# Altium PCB PCB.PcbDoc
Units mil, origin at the board's own origin, x right, y up, seen from the top; angles counter-clockwise.
Board outline 6000 x 4000 mil, 2 copper layers (Top Layer, Bottom Layer); 65 components, 41 nets, 200 pads, 0 vias.
Unrouted connection lines stored in the file: 130.
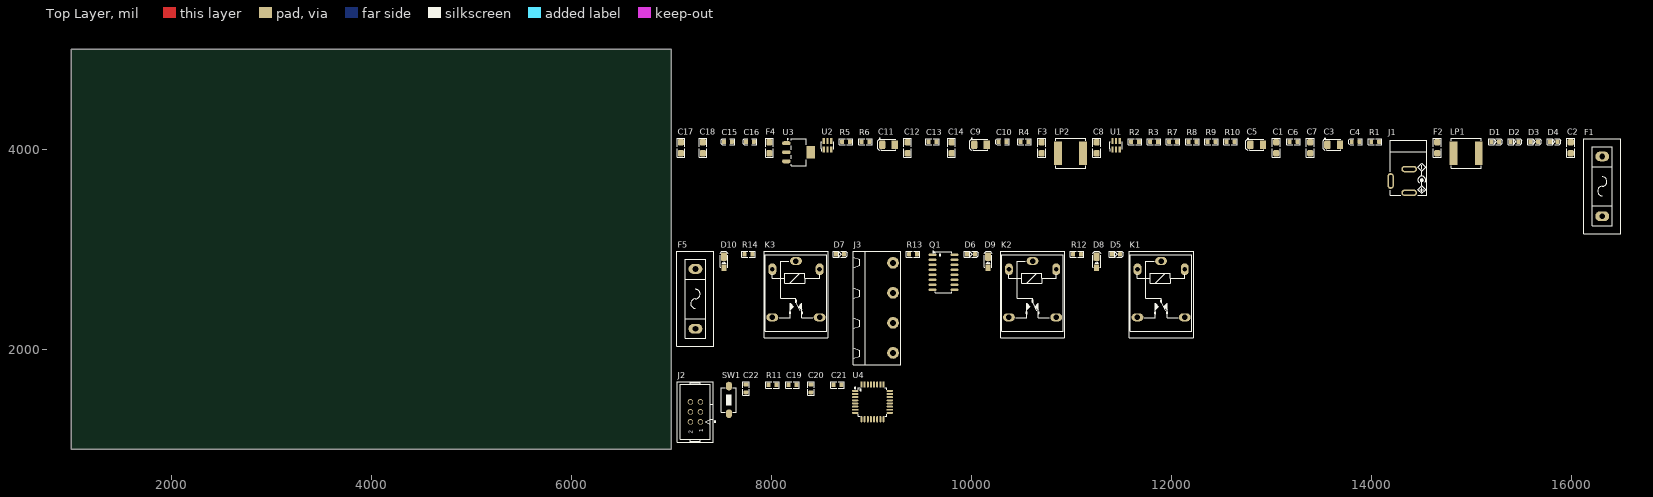
[diagram p0: Top Layer view]
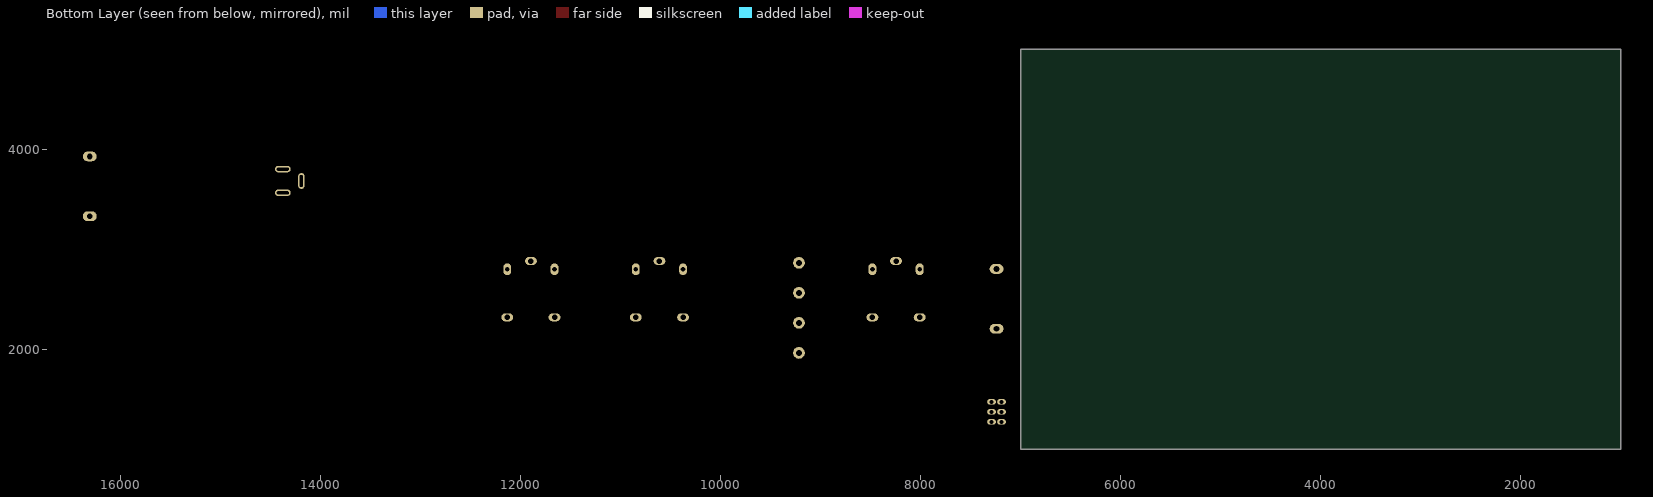
[diagram p1: Bottom Layer view, seen from below]

## Layer stack, top to bottom
Top Solder: solder mask 0.4, Solder Resist, Dk 3.5
Top Layer: signal copper 1.4
Dielectric 1: dielectric 12.6, FR-4, Dk 4.8
Bottom Layer: signal copper 1.4
Bottom Solder: solder mask 0.4, Solder Resist, Dk 3.5

## Board outline
1000,1000 7000,1000 7000,5000 1000,5000

## Design rules (kind name [scope] priority, off if disabled: settings)
Clearance [All] p1: gap=10 ignorepadtopadclearanceinfootprint=FALSE
PolygonConnect [All] p1: connectstyle=Relief reliefconductorwidth=10 reliefentries=4 polygonreliefangle="90 Angle" airgapwidth=10
RoutingVias [All] p1: holewidth=28 width=50 viastyle="Through Hole" minholewidth=28 minwidth=50 maxholewidth=28 maxwidth=50
SolderMaskExpansion [All] p1: expansion=4 istentingtop=FALSE
Width [All] p1: maxlimit=10 minlimit=10 preferedwidth=10
30 further rules are at their usual default settings.

## Classes and differential pairs
component class U_Supply: C1 C2 C3 C4 C5 C6 C7 C8 C9 C10 C11 C12 C13 C14 C15 C16 C17 C18 D1 D2 D3 D4 F1 F2 F3 F4 J1 LP1 LP2 R1 R2 R3 R4 R5 R6 R7 R8 R9 R10 U1 U2 U3
component class U_Outputs: D5 D6 D7 D8 D9 D10 F5 J3 K1 K2 K3 Q1 R12 R13 R14
component class U_Controller: C19 C20 C21 C22 J2 R11 SW1 U4

## Components (designator, comment, footprint, x,y, rotation, side; value= is the part's Value field where it differs from the comment)
C1 "100nF" C1206 13045,4015 r90 top
C2 "100nF" C1206 15990,4015 r90 top
C3 "47uF" C_TN_3528_BLK 13620,4045 r0 top
C4 "10uF" C_TN_2012 13840,4075 r0 top
C5 "10uF" C_TN_3528 12850,4045 r0 top
C6 "68pF" C0805 13220,4075 r0 top
C7 "100nF" C1206 13385,4015 r90 top
C8 "100nF" C1206 11250,4015 r90 top
C9 "47uF" C_TN_3528_BLK 10090,4045 r0 top
C10 "10uF" C_TN_2012 10310,4075 r0 top
C11 "10uF" C_TN_3528 9170,4045 r0 top
C12 "100nF" C1206 9360,4015 r90 top
C13 "82pF" C0805 9610,4075 r0 top
C14 "100nF" C1206 9800,4015 r90 top
C15 "10uF" C_TN_2012 7565,4075 r0 top
C16 "22uF" C_TN_2012 7785,4075 r0 top
C17 "100nF" C1206 7095,4015 r90 top
C18 "100nF" C1206 7315,4015 r90 top
C19 "100nF" C0805 8210,1645 r0 top
C20 "100nF" C0805 8395,1610 r90 top
C21 "100nF" C0805 8660,1645 r0 top
C22 "100nF" C0805 7745,1610 r90 top
D1 "LED805YLW" LED0805YLW 15235,4075 r0 top
D2 "LED805RED" LED0805RED 15430,4075 r0 top
D3 "LED805BLU" LED0805BLU 15625,4075 r0 top
D4 "LED805GRN" LED0805GRN 15820,4075 r0 top
D5 "LED805GRN" LED0805GRN 11445,2950 r0 top
D6 "LED805GRN" LED0805GRN 9995,2950 r0 top
D7 "LED805GRN" LED0805GRN 8685,2950 r0 top
D8 "1N5819" D_SOD123W 11250,2880 r90 top
D9 "1N5819" D_SOD123W 10165,2880 r90 top
D10 "1N5819" D_SOD123W 7525,2880 r90 top
F1 "FUSE2A" FUSH_5X20MM 16305,3630 r90 top
F2 "FUSE3A_1206" F1206 14655,4015 r90 top
F3 "FUSE3A_1206" F1206 10700,4015 r90 top
F4 "FUSE3A_1206" F1206 7980,4015 r90 top
F5 "FUSE2A" FUSH_5X20MM 7240,2505 r90 top
J1 "DC_POWER_JACK" JAC_PWR2 14375,3565 r0 top
J2 "CONN_ISP" IDC_2X3 7240,1375 r90 top
J3 "CONN_GMSTB4" GMSTB762_4 9215,2415 r90 top
K1 "RELAY_SPDT" REL_SPDT_5_2216 11895,2800 r0 top
K2 "RELAY_SPDT" REL_SPDT_5_2216 10610,2800 r0 top
K3 "RELAY_SPDT" REL_SPDT_5_2216 8245,2800 r0 top
LP1 "10uH" L_7 14945,3960 r0 top
LP2 "10uH" L_7 10990,3960 r0 top
Q1 "ULN2003" SO_16 9720,2770 r0 top
R1 "49.9b" R0805 14035,4075 r0 top
R2 "17.8K" R0805 11635,4075 r0 top
R3 "100K" R0805 11825,4075 r0 top
R4 "49.9b" R0805 10530,4075 r0 top
R5 "13.7K" R0805 8745,4075 r0 top
R6 "100K" R0805 8940,4075 r0 top
R7 "1.8k" R0805 12015,4075 r0 top
R8 "680b" R0805 12210,4075 r0 top
R9 "100b" R0805 12400,4075 r0 top
R10 "220b" R0805 12590,4075 r0 top
R11 "10K" R0805 8010,1645 r0 top
R12 "1.8K" R0805 11055,2950 r0 top
R13 "1.8K" R0805 9415,2950 r0 top
R14 "1.8K" R0805 7770,2950 r0 top
SW1 "PUSHBUTTON" SWPBS_SPST_6X3X2 7575,1495 r90 top
U1 "Value?" SOT23-6 11445,4040 r0 top
U2 "Value?" SOT23-6 8560,4040 r0 top
U3 "LD1117" SOT223_4 8275,3970 r0 top
U4 "ATMEGA328" QFG80_32 9010,1475 r0 top

## Footprints (in the part's own frame and the unit in brackets; to place one, negate y for a bottom-side part, rotate by r counter-clockwise, add the part's x,y. Pads: shape width x height; smd on the part's side, far side on the other; paste and mask are expansions set on the pad)
C0805 [mm] "CHIP Capacitor, 2.0X1.3mm, 0805"
  rrect50% 1x1.2 smd paste-0.1 mask+0.075: 1(-1,0) 2(1,0)
  Top Layer pour cut-out: -0.5,0.8 0.5,0.8 0.5,-0.8 -0.5,-0.8
  silkscreen extent -1.7,-0.8 1.7,0.8, body extent -1,-0.62 1,0.63, height 1
C1206 [mm] "CHIP Capacitor, 3.2X1.6mm, 1206"
  rrect50% 1.6x1.6 smd paste-0.8 mask+0.075: 1(-1.4,0) 2(1.4,0)
  Top Layer pour cut-out: -0.8,1 -0.8,-1 0.8,-1 0.8,1
  silkscreen extent -2.4,-1 2.4,1, body extent -1.6,-0.8 1.6,0.8, height 1
C_TN_2012 [mm] "CAPACITOR, TAN N, TAN P, TAN R, 0805P, 2X1.3mm"
  rrect50% 1x1.2 smd paste-0.089 mask+0.075: 1(-1,0) 2(1,0)
  Top Layer pour cut-out: -0.5,0.8 0.5,0.8 0.5,-0.8 -0.5,-0.8
  silkscreen extent -1.7,-0.8 1.7,0.8, body extent -1.04,-0.69 1.21,0.66, height 1.35
C_TN_3528 [mm] "CAPACITOR, TAN B, TAN H, TAN T, TAN M, 3528P, 1210P, 3.5X2.8mm"
  rrect50% 1.6x2.2 smd paste-0.152 mask+0.1: 1(-1.6,0)
  rect 1.6x2.2 smd paste-0.151 mask+0.1: 2(1.6,0)
  Top Layer pour cut-out: -0.889,1.4 -0.889,-1.4 0.889,-1.4 0.889,1.4
  silkscreen extent -2.7,-1.4 1.8,1.65, body extent -1.85,-1.46 1.85,1.47, height 2.03
C_TN_3528_BLK [mm] "CAPACITOR, TAN B, 3.5X2.8mm, BLACK"
  rrect50% 1.6x2.2 smd paste-0.152 mask+0.1: 1(-1.6,0)
  rect 1.6x2.2 smd paste-0.151 mask+0.1: 2(1.6,0)
  Top Layer pour cut-out: -0.889,1.4 -0.889,-1.4 0.889,-1.4 0.889,1.4
  silkscreen extent -2.7,-1.4 1.8,1.65, body extent -1.85,-1.5 1.85,1.5, height 2.1
D_SOD123W [mm] "PowerDI-123, SOD123, DO-213AA, 1206D"
  rect 1.6x1.2 smd paste-0.1 mask+0.1: 1(-1.6,0)
  rrect50% 2.2x1.6 smd paste-0.1 mask+0.1: 2(1.2,0)
  Top Layer pour cut-out: -1.016,1.1 -1.016,-1.1 1.016,-1.1 1.016,1.1
  silkscreen extent -1.5,-1 2.6,1, body extent -1.95,-0.97 1.95,0.96, height 1
F1206 [mm] "FUSE, 1206, 3.2x1.6mm"
  rrect50% 1.6x1.6 smd paste-2 mask+0.075: 1(-1.4,0) 2(1.4,0)
  Top Layer pour cut-out: -0.8,1 -0.8,-1 0.8,-1 0.8,1
  silkscreen extent -2.4,-1 2.4,1, body extent -1.6,-0.8 1.6,0.8, height 1
FUSH_5X20MM [mm] "PCB Fuse Holder 5x20mm 2 PIN, pitch: 15.0mm  24x9mm"
  oval 2.5x3.5 hole 1.5: 1(-7.6,0) 2(7.6,0)
  silkscreen extent -12.1,-4.7 12.1,4.7, body extent -12,-4.54 12,4.54, height 13.46
GMSTB762_4 [mm] "PHOENIX, GMSTB 2,5/4-G-7,62, 7.62mm pitch, 4pin"
  round 3 hole 1.5: 1(-11.43,0) 2(-3.81,0) 3(3.81,0) 4(11.43,0)
  silkscreen extent -14.4,-2 14.4,10.1, body extent -14.34,-1.9 14.34,10.1, height 9.1
IDC_2X3 [mm]
  round 1.4 / inner round 1.4 / far side oval 1.4x2.2 hole 1 mask+0.1: 1(-2.54,-1.27) 2(-2.54,1.27) 3(0,-1.27) 4(0,1.27) 5(2.54,-1.27) 6(2.54,1.27)
  silkscreen extent -7.7,-5.2 7.7,4.6, body extent -7.64,-4.42 7.64,4.75, height 9.13
JAC_PWR2 [mm] "DC POWER JACK, Power Jack KLDX-0202"
  oval 4x1.6 hole 0.8 slot 3 at 0 deg: 1(0,0) 2(0,6)
  oval 1.6x4 hole 0.8 slot 3 at 90 deg: 3(-4.7,3)
  silkscreen extent -4.8,-0.6 4.5,13.4, body extent -4.9,-0.65 4.5,13.85, height 10.8
L_7 [mm] "INDUCTOR, 7.3x7.3x4.5mm, CDRH74, 7.2x6.9mm, 7.1x6.5mm"
  rect 2x6 smd paste-3: 1(-3.2,0) 2(3.2,0)
  silkscreen extent -3.8,-3.8 3.8,3.8, body extent -3.7,-3.7 3.7,3.7, height 4.15
LED0805BLU [mm] "LED SMD 0805, BLUE"
  rect 1x1.2 smd paste-2 mask+0.075: 1(-1,0)
  rrect50% 1x1.2 smd paste-2 mask+0.075: 2(1,0)
  Top Layer pour cut-out: -0.5,0.8 0.5,0.8 0.5,-0.8 -0.5,-0.8
  silkscreen extent -1.7,-0.8 1.8,0.8, body extent -1,-0.63 1,0.63, height 0.7
LED0805GRN [mm] "LED SMD 0805, GREEN"
  rect 1x1.2 smd paste-2 mask+0.075: 1(-1,0)
  rrect50% 1x1.2 smd paste-2 mask+0.075: 2(1,0)
  Top Layer pour cut-out: -0.5,0.8 0.5,0.8 0.5,-0.8 -0.5,-0.8
  silkscreen extent -1.7,-0.8 1.8,0.8, body extent -1,-0.63 1,0.63, height 0.7
LED0805RED [mm] "LED SMD 0805, RED"
  rect 1x1.2 smd paste-2 mask+0.075: 1(-1,0)
  rrect50% 1x1.2 smd paste-2 mask+0.075: 2(1,0)
  Top Layer pour cut-out: -0.5,0.8 0.5,0.8 0.5,-0.8 -0.5,-0.8
  silkscreen extent -1.7,-0.8 1.8,0.8, body extent -1,-0.63 1,0.63, height 0.7
LED0805YLW [mm] "LED SMD 0805, YELLOW"
  rect 1x1.2 smd paste-2 mask+0.075: 1(-1,0)
  rrect50% 1x1.2 smd paste-2 mask+0.075: 2(1,0)
  Top Layer pour cut-out: -0.5,0.8 0.5,0.8 0.5,-0.8 -0.5,-0.8
  silkscreen extent -1.7,-0.8 1.8,0.8, body extent -1,-0.63 1,0.63, height 0.7
QFG80_32 [mm] "TQFP32, A32 (Cypress), GP32 (Zarlink), MS-026ABA(JEDEC), 7X7mm, 0.8mm"
  oval 1.6x0.5 smd: 1(-4.4,2.8) 2(-4.4,2) 3(-4.4,1.2) 4(-4.4,0.4) 5(-4.4,-0.4) 6(-4.4,-1.2) 7(-4.4,-2) 8(-4.4,-2.8) 17(4.4,-2.8) 18(4.4,-2) 19(4.4,-1.2) 20(4.4,-0.4) 21(4.4,0.4) 22(4.4,1.2) 23(4.4,2) 24(4.4,2.8)
  oval 0.5x1.6 smd: 9(-2.8,-4.4) 10(-2,-4.4) 11(-1.2,-4.4) 12(-0.4,-4.4) 13(0.4,-4.4) 14(1.2,-4.4) 15(2,-4.4) 16(2.8,-4.4) 25(2.8,4.4) 26(2,4.4) 27(1.2,4.4) 28(0.4,4.4) 29(-0.4,4.4) 30(-1.2,4.4) 31(-2,4.4) 32(-2.8,4.4)
  silkscreen extent -4.6,-3.6 3.6,3.7, body extent -4.5,-4.5 4.5,4.5, height 1.6
R0805 [mm] "CHIP RESISTOR 1/8 WATT ,2.0X1.3mm, 0805, 2012"
  rrect50% 1x1.2 smd paste-0.1 mask+0.075: 1(-1,0) 2(1,0)
  Top Layer pour cut-out: -0.5,0.8 0.5,0.8 0.5,-0.8 -0.5,-0.8
  silkscreen extent -1.7,-0.8 1.7,0.8, body extent -1.15,-0.67 1.15,0.68, height 0.76
REL_SPDT_5_2216 [mm] "RELAY SPDT, OMRON G5LE SERIES, 22X16mm and 18.8x15.4mm, HJR-3FF, RAS-1215"
  oval 3x2 hole 1.4: 1(0,2.1) 2(6,-12.2) 3(-6,-12.2)
  oval 2x3 hole 1.2: 4(-6,0) 5(6,0)
  silkscreen extent -8.1,-17.35 8.1,4.65, body extent -7.95,-15.75 7.95,3.75, height 15.5
SO_16 [mm] "SOP, SOIC, 3.9mm width, 1.27mm pitch,"
  oval 2x0.6 smd: 1(-2.8,4.445) 2(-2.8,3.175) 3(-2.8,1.905) 4(-2.8,0.635) 5(-2.8,-0.635) 6(-2.8,-1.905) 7(-2.8,-3.175) 8(-2.8,-4.445) 9(2.8,-4.445) 10(2.8,-3.175) 11(2.8,-1.905) 12(2.8,-0.635) 13(2.8,0.635) 14(2.8,1.905) 15(2.8,3.175) 16(2.8,4.445)
  silkscreen extent -2.8,-5.2 2.1,5.4, body extent -3.1,-4.95 3.1,4.95, height 1.7
SOT23-6 [mm] "SOT-457/SC-74; 6 Leads; Body 3 x 3 mm, inc. leads (LxW max)"
  rect 0.55x1.45 smd: 1(-0.95,-1.075) 2(0,-1.075) 3(0.95,-1.075) 4(0.95,1.075) 5(0,1.075) 6(-0.95,1.075)
  silkscreen extent -1.57,-1.35 1.55,0.9, body extent -1.45,-1.4 1.45,1.4, height 1.45
SOT223_4 [mm] "SOT223, 4-Leads, Body 6.5x3.5mm, Pitch 2.30mm"
  oval 2.2x1 smd: 1(-3.2,2.3) 2(-3.2,0) 3(-3.2,-2.3)
  rect 2.2x3.2 smd paste-5: 4(3,0)
  Top Layer pour cut-out: -1.7,3.556 1.7,3.556 1.7,-3.556 -1.7,-3.556
  silkscreen extent -3.02,-3.4 1.9,3.47, body extent -3.5,-3.25 3.5,3.25, height 1.7
SWPBS_SPST_6X3X2 [mm] "SWITCH, PUSHBUTTON, SMD, SPST, 6X3.5X2.5mm, RS-282G05A3, SKQYPA, 50000 Cycles"
  oval 2.2x1.6 smd mask+0.1: 1(-3.5,0) 2(3.5,0)
  silkscreen extent -3.1,-1.9 3.1,1.9, body extent -3.4,-1.86 3.4,1.86, height 2.5

## Part data
C1 C2 C7 C8 C12 C14 C17 C18: library part CAP_SMD_MLCC_1206, "CAP, MLCC", ASSEMBLY=ASSEMBLY, MANF=-, MANF_P#=MANF_PART#, PARAM="-, -%", PARAM2=-V, PRICE="100= 1$"
C3 C4 C9 C10 C15 C16: library part CAP_SMD_TAN, "CAP, SMD, TAN", MANF=VISHAY, MANF_P#=T55A106M6R3C0300, PARAM="20%, 300mOhm, -55~105oC", PARAM2=6.3V, PRICE=0.46$
C5 C11: library part CAP_SMD_TAN_10uF_16V, "CAP, SMD, TAN", MANF=AVX, MANF_P#=TCJT106M016R0200, PARAM="20%, 200mOhm, -55~105oC", PARAM2=25V, PRICE=1$
C6 C13 C19 C20 C21 C22: library part CAP_SMD_MLCC_0805, "CAP, MLCC", ASSEMBLY=ASSEMBLY, MANF=-, MANF_P#=MANF_PART#, PARAM="-, -%", PARAM2=-V, PRICE="100= 1$"
D1: library part LED_SMD_0805_YLW, "LED, SMD, 0805, YELLOW", ASSEMBLY=ASSEMBLY, DESC=DESCRIPTION, MANF=MANF, MANF_P#=MANF_PART#, PARAM2=2.2V, PRICE=36t@Javan
D2: library part LED_SMD_0805_RED, "LED, SMD, 0805, RED", ASSEMBLY=ASSEMBLY, DESC=DESCRIPTION, MANF=MANF, MANF_P#=MANF_PART#, PARAM2=2.2V, PRICE=36t@Javan
D3: library part LED_SMD_0805_BLU, "LED, SMD, 0805, BLUE", ASSEMBLY=ASSEMBLY, DESC=DESCRIPTION, MANF=MANF, MANF_P#=MANF_PART#, PARAM2=2.2V, PRICE=36t@Javan
D4 D5 D6 D7: library part LED_SMD_0805_GRN, "LED, SMD, 0805, GREEN", ASSEMBLY=ASSEMBLY, DESC=DESCRIPTION, MANF=-, MANF_P#=-, PARAM=20mA, PARAM2=2.2V, PRICE=36t@Javan
D8 D9 D10: library part DIODE_SMD_SCHOTTKY_1N5819, "DIODE, SCHOTTKY, 40V, 1A", ASSEMBLY=ASSEMBLY, DESC=DESCRIPTION, MANF=DIODES, MANF_P#=1N5819HW-7-F, PARAM=40V, PARAM2=1A, PRICE=PRICE
F1 F5: library part FUSE_5X20, "Fuse HOLDER 5X20", MANF=MANF, MANF_P#=MANF_PART#, PARAM2=PARAM2
  F1: PARAM=3A
  F5: PARAM=5A
F2 F3 F4: library part FUSE_3A_1206_SLOW, "Fuse, 3A, 32VDC, 1206, SMD, Slow Blow", MANF=Bourns, MANF_P#=SF-1206SP300-2, PARAM2=0.027Ohm, PRICE=0.9$
  F2: PARAM=2A
  F3: PARAM=1A
  F4: PARAM=0.5A
J1: library part CONN_PWR_JACKR2, "CONN, PWR JACK DC, PLUG DIAM 2.0MM RA THD", MANF="CUI STACK", MANF_P#="PJ-202A, PJ-002AH, PJ-102AH, KLDX-0202"
J2: library part CONN_AVR_ISP_IDC6, "CONN, ISP, AVR , HEADER BOX"
J3: library part CONN_GMSTB762_4, "CONN, PHOENIX MSTB, 5-G, 5.08mm pitch", MANF_P#="GMSTB 2,5/4-G-7,62", PARAM=12A, PARAM2=630V
K1 K2 K3: library part RELAY_SPDT_5_2216_G5LE, "Relay, SPDT, 5P, 22X16mm, 120V/10A", MANF=OMRON, MANF_P#=G5LE-1, PARAM="12V, 50mA", PARAM2="250VAC, 10A", PRICE=PRICE
LP1 LP2: library part IND_SMD_3.3uH_8A, "INDUCTOR, 3.3uH, 3.8A TDK", ASSEMBLY=ASSEMBLY, DESC="INDUCTOR, 3.3uH, 8A (Irms), 10mOhm", MANF=Bourns, MANF_P#=SRP7050TA-3R3M, PARAM=3.8A, PARAM2=10mOhm, PRICE=1.3$
Q1: library part ULN2003_SOP16_ST, "Darlington, 7-CH, 50V, 0.5A, 5V TTL/CMOS", MANF=ST, MANF_P#=ULN2003D1, PARAM="7-CH, 50V, 0.5A", PARAM2="5V TTL/CMOS"
R1 R2 R3 R4 R5 R6 R7 R8 R9 R10 R11 R12 R13 R14: library part RES_SMD_0805, "RESISTOR, SMD", ASSEMBLY=ASSEMBLY, DESC=DESCRIPTION, DIST#=MOUSER, MANF=-, MANF_P#=-, PARAM=-W, PARAM2=1%, PRICE="100= 0.5$"
SW1: library part SWPBS_SPST_6X3X2_RS282, "SWITCH, PUSH BUTTON, TACTILE, SMD, SPST, 6X3.5X2.5mm", ASSEMBLY=ASSEMBLY, DESC=DESCRIPTION, MANF=C&K, MANF_P#="RS-282G05A3-SM RT", PARAM=PARAM, PRICE=0.8$
U1 U2: library part IC_Reg_TPS54302, "3'A Synchronous Step-Down Converter", Package=SOT-23-6, Rating=S, Inflow=inflow?, Type=Switching
U3: library part VREG_1117_SOT223, "REG, Linear, LDO1V, 0.8A, SOT-223", MANF="TI, ON, ST", MANF_P#="LD1117, LM1117, AMS1117, TLV1117, REG1117, NCP1117, LT1117, SPX1117", PARAM="LDO1V, 0.8A", PARAM2=1.2/1.5/1.8/2.5/2.85/3.3/5V
U4: library part ATMEGA328_QFP32, "MCU, AVR, 8-Bit, 16KB, 1KB RAM, 20MHz", DESC="1KB EEPROM", MANF=ATMEL/MICROCHIP, MANF_P#=ATMEGA328-AU, PARAM="32KB, 2KB RAM, 20MHz, -40~85°C", PARAM2=1.8~5.5V, PART#ALT=ATmega8-48-88-168-328, PRICE=2.2$

## Nets (pads, with @x,y where several pads share a name; then routed paths per layer and width w, separated by ;. In a path a pad name is that pad's centre, name@x,y a point inside that pad or via, vN(x,y) a via of type N, cw(c..) or ccw(c..) an arc to the next point about the centre after c; other vN are vias at no path point)
+3.3: C16.1 C18.2 C19.2 C20.2 C21.2 D4.1 R11.1 U3.2 U3.4 U4.4 U4.6 U4.18 U4.20
+4: C3.1 C4.1 C7.2 D3.1 LP1.2 R1.2
+5: C9.1 C10.1 C14.2 D2.1 F4.1 LP2.2 R4.2
+12: D1.1 D5.1 D6.1 D7.1 D8.2 D9.2 D10.2 F1.2 F2.1 F3.1 K1.4 K2.4 K3.4 Q1.9
GND: C1.1 C3.2 C4.2 C5.1 C7.1 C9.2 C10.2 C11.1 C12.1 C14.1 C15.2 C16.2 C17.1 C18.1 C19.1 C20.1 C21.1 C22.1 J1.2 J1.3 J2.6 Q1.8 R2.2 R5.2 R7.1 R8.1 R9.1 R10.1 SW1.1 U1.1 U2.1 U3.1 U4.3 U4.5 U4.21
MISO: J2.1 U4.16
MOSI: J2.4 U4.15
Motor: Q1.2 U4.13
NetC1_2: C1.2 C5.2 F2.2 U1.3 U1.5
NetC2_1: C2.1 LP1.1 U1.2
NetC2_2: C2.2 U1.6
NetC6_1: C6.1 R2.1 R3.2 U1.4
NetC6_2: C6.2 R1.1 R3.1
NetC8_1: C8.1 LP2.1 U2.2
NetC8_2: C8.2 U2.6
NetC11_2: C11.2 C12.2 F3.2 U2.3 U2.5
NetC13_1: C13.1 R5.1 R6.2 U2.4
NetC13_2: C13.2 R4.1 R6.1
NetC15_1: C15.1 C17.2 F4.2 U3.3
NetD1_2: D1.2 R7.2
NetD2_2: D2.2 R8.2
NetD3_2: D3.2 R9.2
NetD4_2: D4.2 R10.2
NetD5_2: D5.2 R12.2
NetD6_2: D6.2 R13.2
NetD7_2: D7.2 R14.2
NetD8_1: D8.1 K1.5 Q1.16 R12.1
NetD9_1: D9.1 K2.5 Q1.15 R13.1
NetD10_1: D10.1 K3.5 Q1.14 R14.1
NetF1_1: F1.1 J1.1
NetF5_2: F5.2 K2.1 K3.1
NetJ3_1: J3.1 K1.3
NetJ3_2: J3.2 K1.2
NetJ3_3: J3.3 K3.3
NetK1_1: K1.1 K2.3
Null: J3.4
Phase: F5.1
Pump: Q1.3 U4.14
Reset: C22.2 J2.5 R11.2 SW1.2 U4.29
SCK: J2.3 U4.17
Speed: Q1.1 U4.12
pads on no net: J2.2 K2.2 K3.2 Q1.4 Q1.5 Q1.6 Q1.7 Q1.10 Q1.11 Q1.12 Q1.13 U4.1 U4.2 U4.7 U4.8 U4.9 U4.10 U4.11 U4.19 U4.22 U4.23 U4.24 U4.25 U4.26 U4.27 U4.28 U4.30 U4.31 U4.32

## Text inside footprints (layer, text, board x,y; h text height)
J2: Top Overlay "2" at 7211,1158 h39.37 r90; Top Overlay "1" at 7316,1169 h39.37 r90